# Altium PCB ET-master.PcbDoc (part 1 of 2)
Units mil, origin at the board's own origin, x right, y up, seen from the top; angles counter-clockwise.
Board outline 6299 x 3937 mil, 4 copper layers (TopLayer, agnd, power, BottomLayer); 134 components, 185 nets, 734 pads, 100 vias.
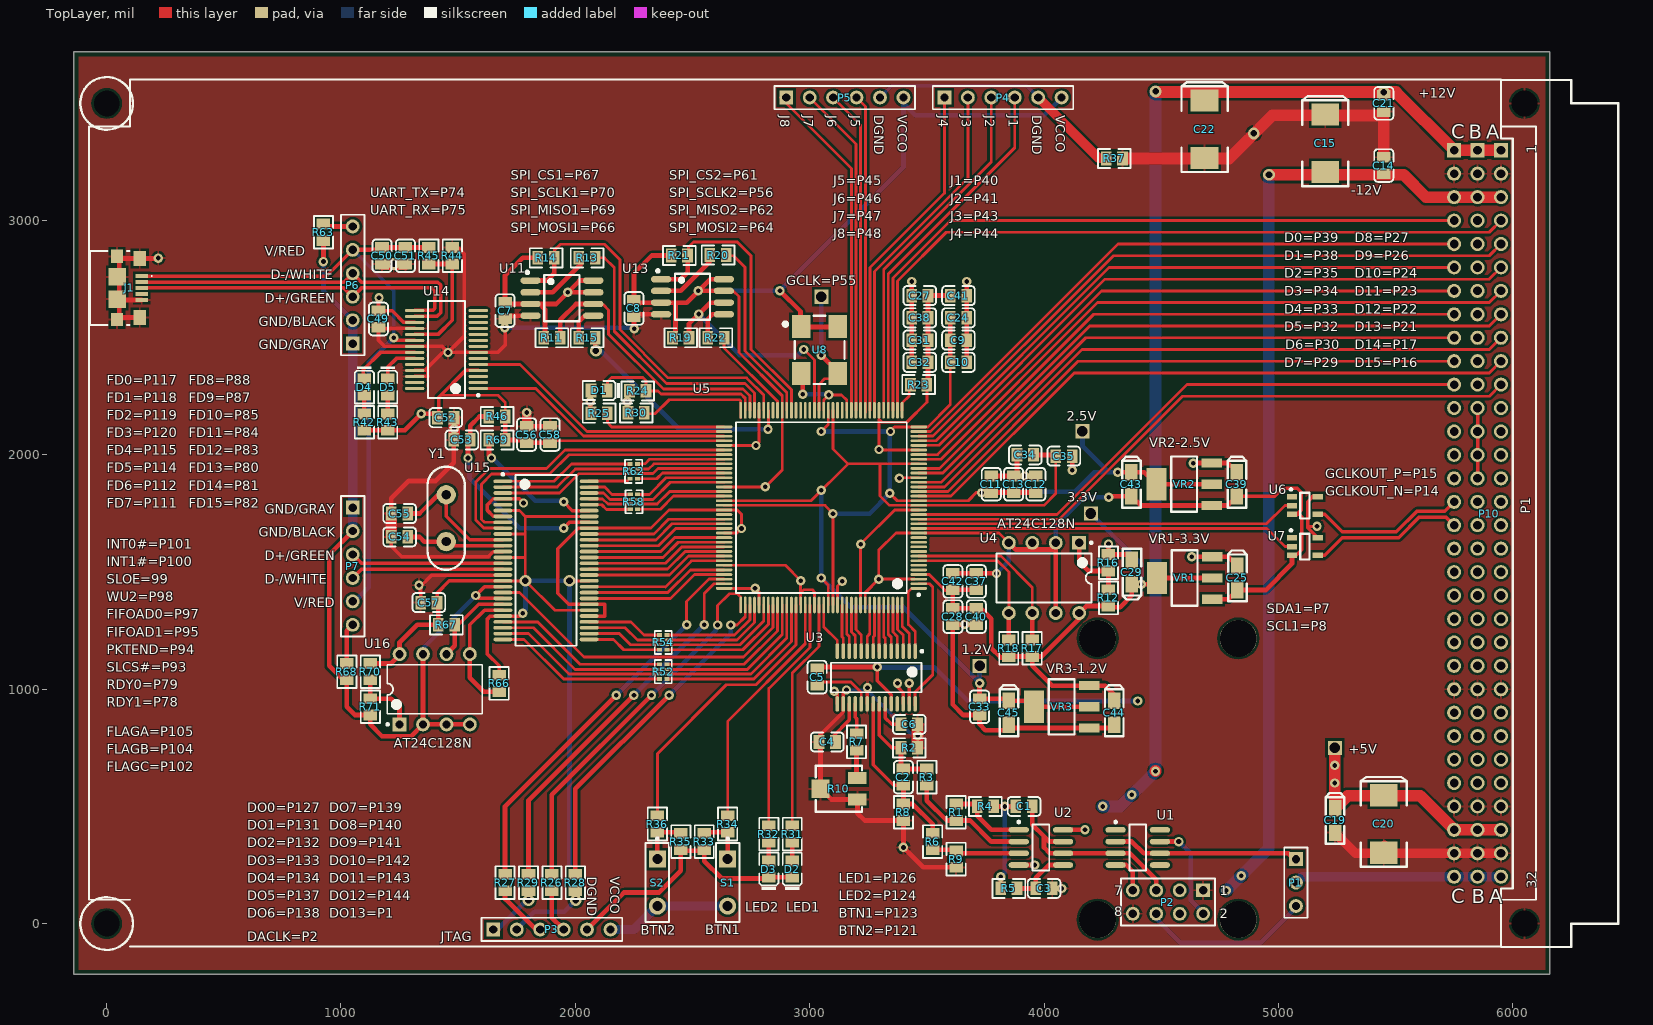
[diagram p0: TopLayer view]
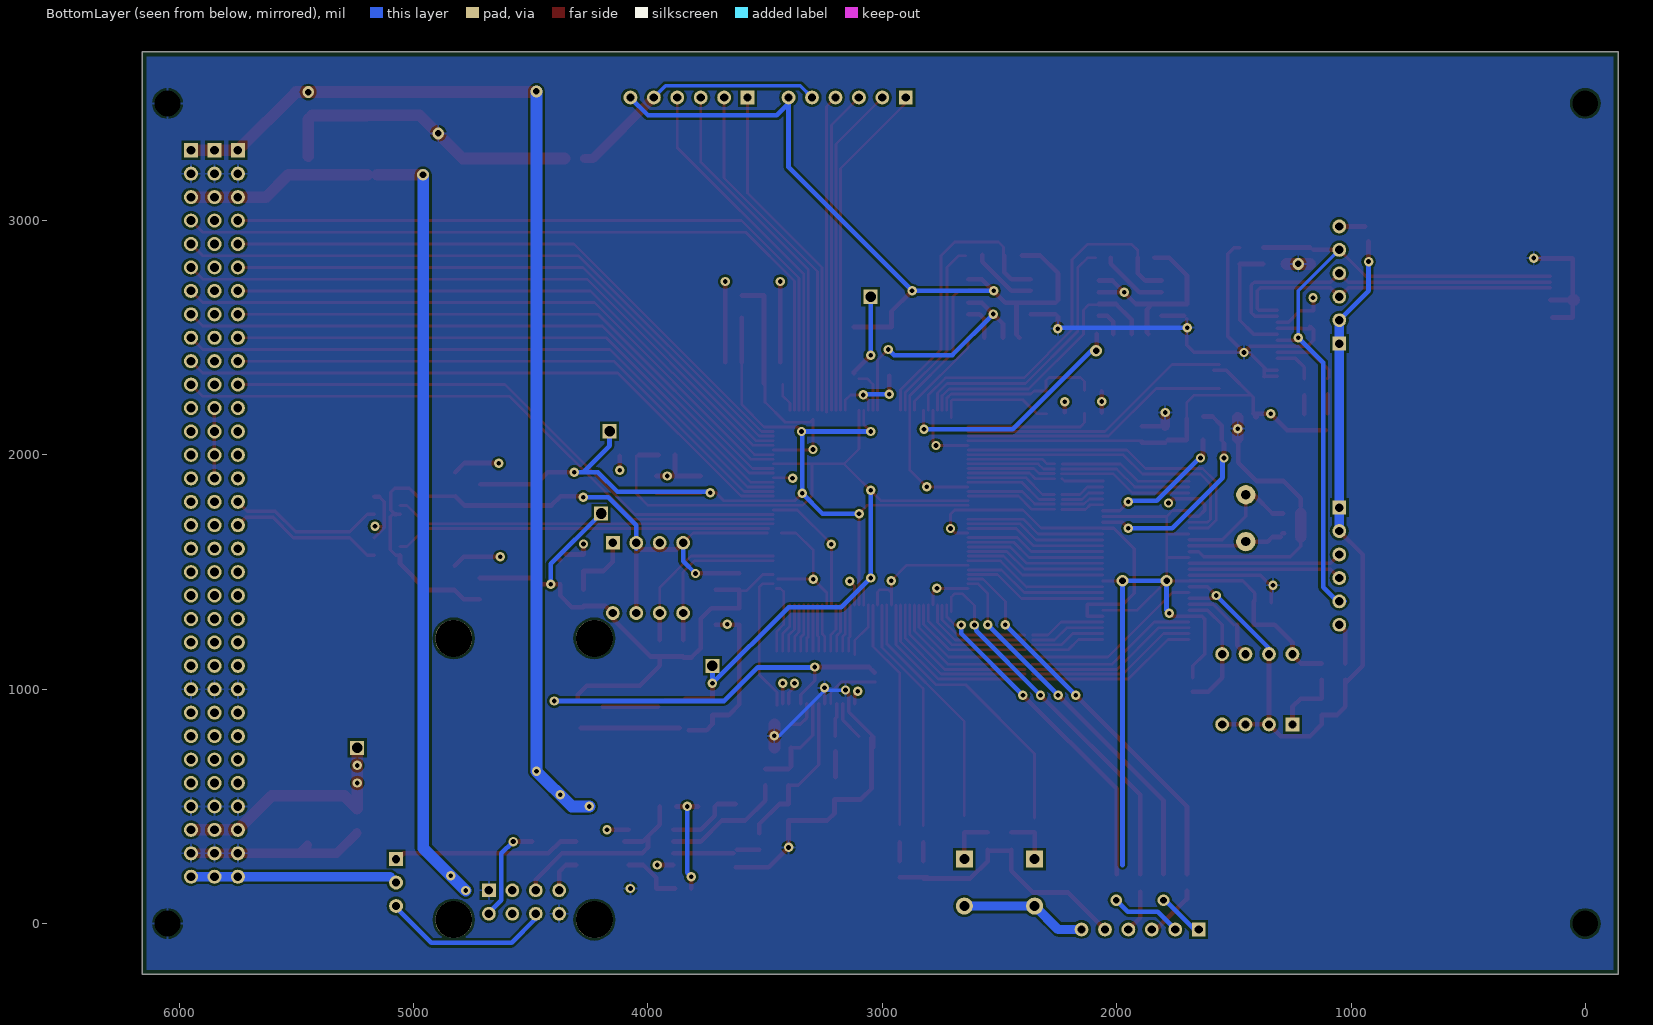
[diagram p1: BottomLayer view, seen from below]
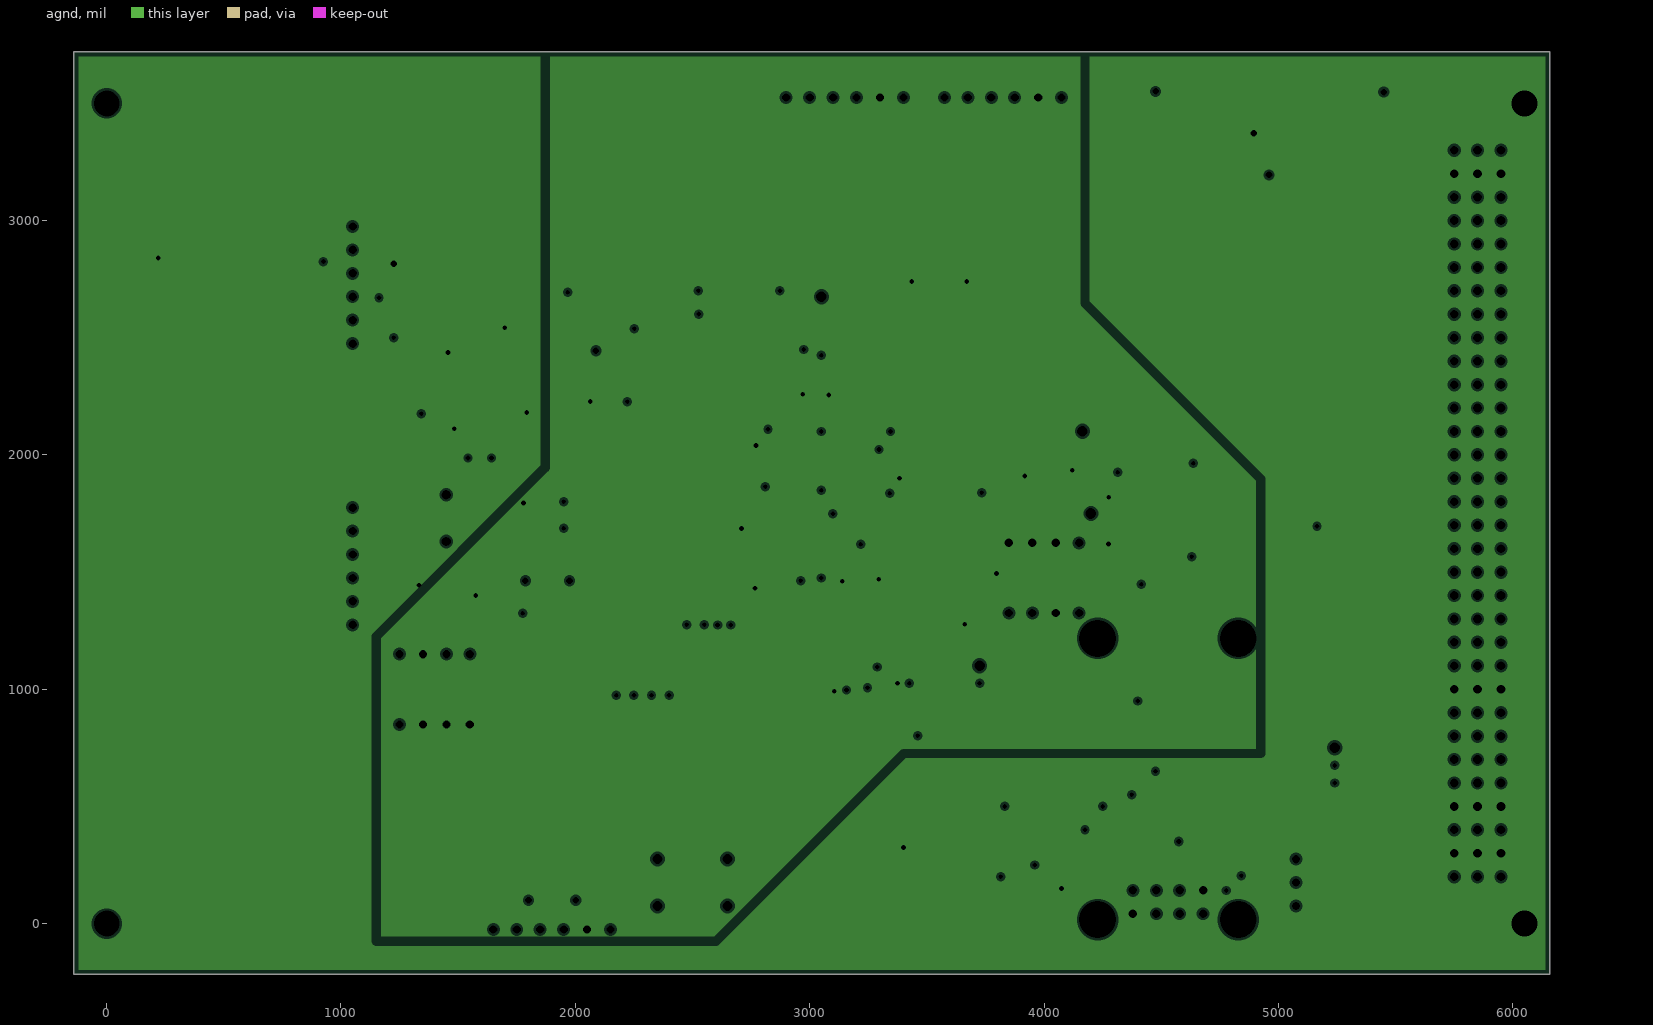
[diagram p2: agnd, clearances drawn from the general rule]
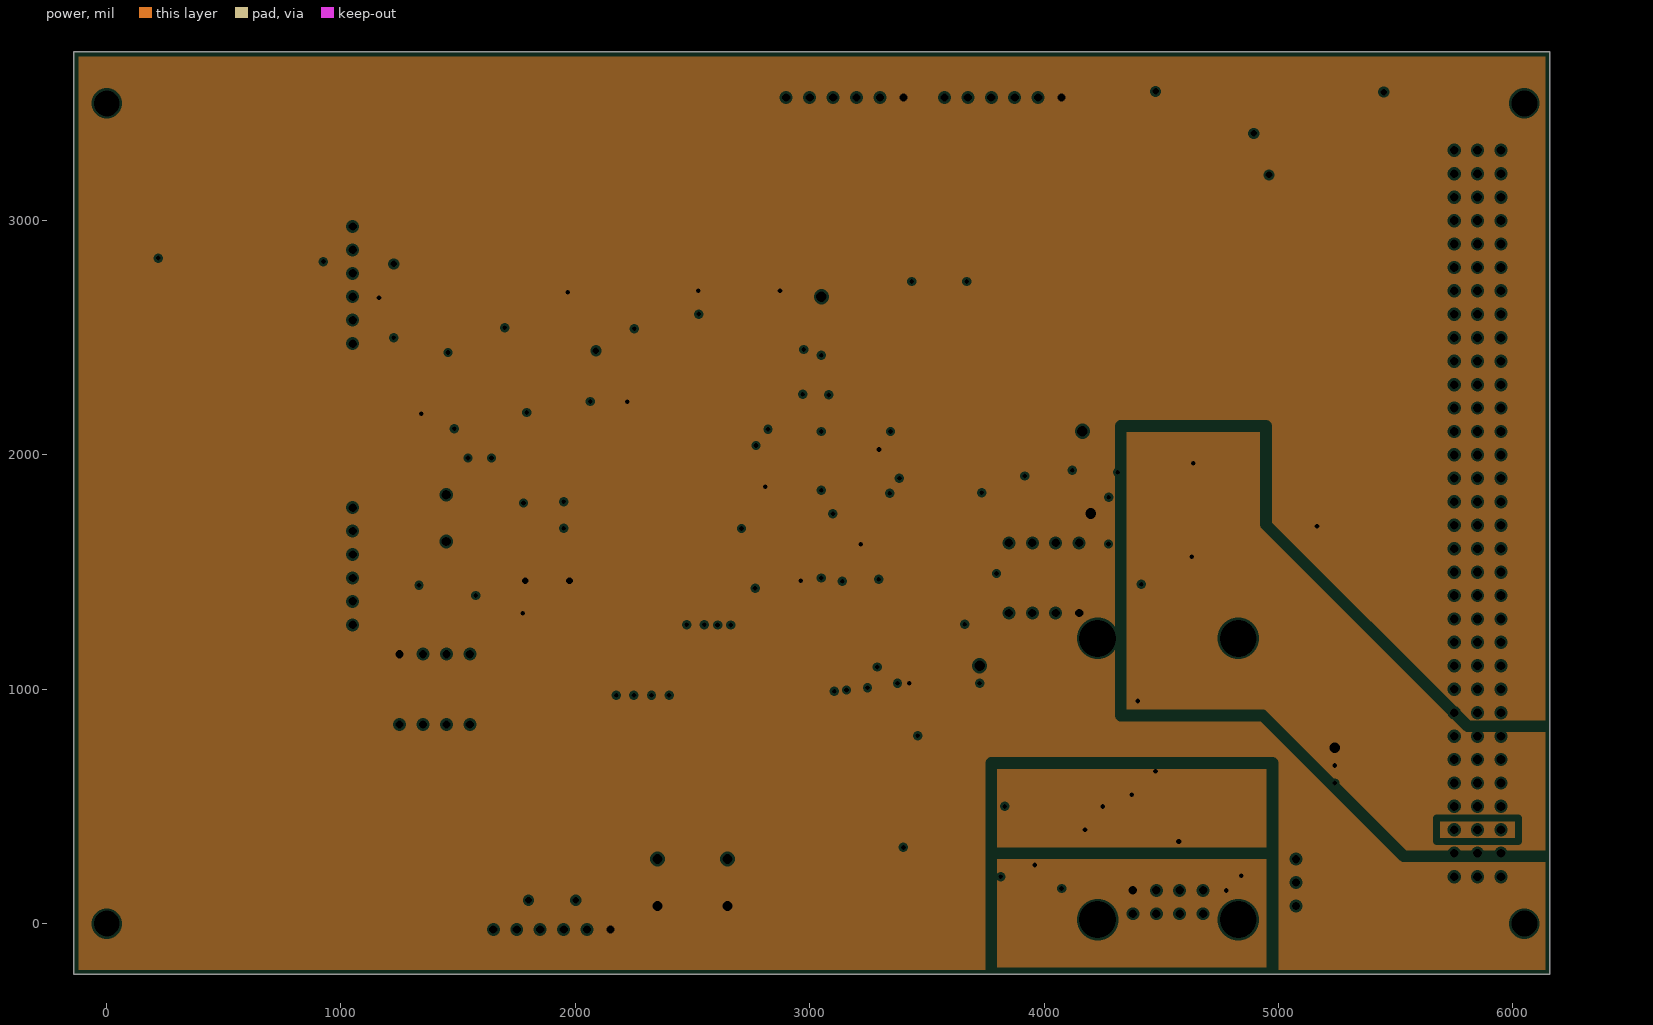
[diagram p3: power, clearances drawn from the general rule]
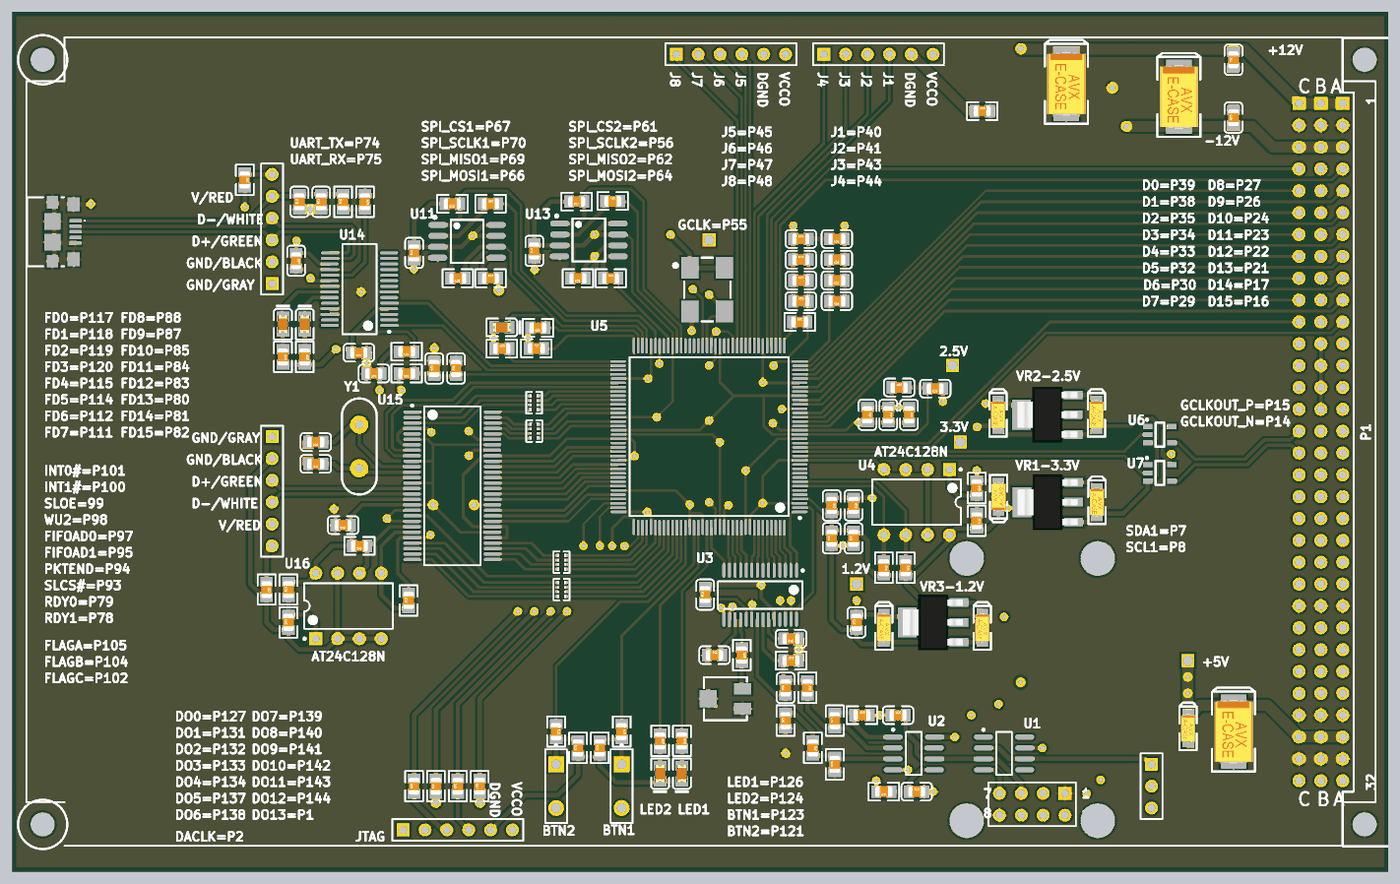
[diagram p5: 3D render of the assembled board from above, using the file's embedded part models]

## Layer stack, top to bottom
TopSolder: solder mask 0.4, Solder Resist, Dk 3.5
TopLayer: signal copper 1.4
Dielectric1: core 12.6, FR-4, Dk 4.8
agnd: plane copper 1.4, net (Multiple Nets)
Dielectric2: prepreg 12.6, FR-4, Dk 4.8
power: plane copper 1.4, net (Multiple Nets)
Dielectric3: core 12.6, FR-4, Dk 4.8
BottomLayer: signal copper 1.4
BottomSolder: solder mask 0.4, Solder Resist, Dk 3.5

## Board outline
-140,-217 6159,-217 6159,3720 -140,3720

## Design rules (kind name [scope] priority, off if disabled: settings)
Clearance [All] p1: gap=6
DiffPairsRouting [All] p1: maxlimit=10 minlimit=10 mostfreqgap=10 toplayer_minwidth=15 toplayer_maxwidth=15 toplayer_prefwidth=15 bottomlayer_minwidth=15 bottomlayer_maxwidth=15 bottomlayer_prefwidth=15 maxuncoupledlength=500
FabricationTestPointUsage TestPointUsage [All] p1: valid=0 allowmultiple=FALSE
FabricationTestpoint Testpoint [All] p1: side=3 testpointundercomponent=TRUE minsize=40 maxsize=100 preferedsize=60 minholesize=20 maxholesize=40 preferedholesize=32 testpointgrid=1 allowsidetop=TRUE allowsidebottom=TRUE usegrid=TRUE gridtolerance=0.01
PlaneClearance [All] p1: clearance=10
PlaneConnect [All] p1: planeconnectstyle=Relief reliefexpansion=20 reliefentries=4 reliefconductorwidth=10 reliefairgap=10
PolygonConnect [All] p1: connectstyle=Relief reliefconductorwidth=10 reliefentries=4 polygonreliefangle="90 Angle" airgapwidth=10
RoutingVias [All] p1: holewidth=20 width=40 viastyle="Through Hole" minholewidth=20 minwidth=40 maxholewidth=20 maxwidth=40
SilkToSolderMaskClearance SilkscreenOverComponentPads [IsPad] p1: minsilkscreentomaskgap=10 clearancetoexposedcopper=TRUE
SolderMaskExpansion [All] p1: expansion=2
Width [All] p1: maxlimit=100 minlimit=10 preferedwidth=20
23 further rules are at their usual default settings.

## Classes and differential pairs
component class ET-UARTPmod: C49 C50 C51 C52 D4 D5 J1 P4 P5 P6 R42 R43 R44 R45 R63 U14
component class ET-FLASHEEPROM: C7 C8 D1 P3 R11 R12 R13 R14 R15 R16 R17 R18 R19 R20 R21 R22 R23 R24 R25 R26 R27 R28 R29 R30 U4 U11 U13
component class ET-DAC: C1 C2 C3 C4 C5 C6 J2 P1 P2 R1 R2 R3 R4 R5 R6 R7 R8 R9 R10 U1 U2 U3
component class ET-power: C9 C10 C11 C12 C13 C14 C15 C19 C20 C21 C22 C24 C25 C27 C28 C29 C31 C32 C33 C34 C35 C37 C38 C39 C40 C41 C42 C43 C44 C45 P10 R37 VR1 VR2 VR3
component class ET-FPGAIO: U5 U6 U7
component class ET-GCLK: D2 D3 R31 R32 R33 R34 R35 R36 S1 S2 U8
component class ET-USB: C53 C54 C55 C56 C57 C58 P7 R46 R52 R54 R58 R62 R66 R67 R68 R69 R70 R71 U15 U16 Y1
differential pair GCLKOUT: +GCLKOUT_P -GCLKOUT_N
differential pair GCLK: +GCLK_P -GCLK_N
differential pair USBD: +USBD_P -USBD_N
differential pair D: +D_P -D_N

## Components (designator, comment, footprint, x,y, rotation, side; value= is the part's Value field where it differs from the comment)
C1 "47pF (470) 5% 50V" LC-0805_C 3914.96,500 r0 top
C2 "22pF (220) 5% 50V" LC-0805_C 3400,625 r90 top
C3 "47pF (470) 5% 50V" LC-0805_C 4000,150 r0 top
C4 "100nF(104) 10% 50V" LC-0805_C 3075,775 r0 top
C5 "100nF(104) 10% 50V" LC-0805_C 3032,1052 r90 top
C6 "100nF(104) 10% 50V" LC-0805_C 3425,850 r180 top
C7 "100nF(104) 10% 50V" LC-0805_C 1700,2616 r90 top
C8 "100nF(104) 10% 50V" LC-0805_C 2250,2625 r90 top
C9 "4.7uF" LC-0805_C 3635,2490 r180 top
C10 "4.7uF" LC-0805_C 3635,2395 r180 top
C11 "4.7uF" LC-0805_C 3775,1875 r270 top
C12 "4.7uF" LC-0805_C 3965,1875 r270 top
C13 "4.7uF" LC-0805_C 3870,1875 r270 top
C14 "100nF(104) 10% 50V" LC-0805_C 5450,3235 r90 top
C15 "22uF" CASE-E_7343 5200,3330 r90 top
C19 "10uF (106) ±10% 16V" LC-CASE-A_3216 5242,440 r90 top
C20 "22uF" CASE-E_7343 5450,425 r90 top
C21 "100nF(104) 10% 50V" LC-0805_C 5450,3500 r90 top
C22 "22uF" CASE-E_7343 4685,3390 r90 top
C24 "470nF" LC-0805_C 3635,2585 r180 top
C25 "10uF (106) ±10% 16V" LC-CASE-A_3216 4825,1475 r90 top
C27 "470nF" LC-0805_C 3470,2680 r0 top
C28 "4.7uF" LC-0805_C 3611,1310 r90 top
C29 "10uF (106) ±10% 16V" LC-CASE-A_3216 4375,1500 r270 top
C31 "470nF" LC-0805_C 3470,2490 r0 top
C32 "4.7uF" LC-0805_C 3470,2395 r0 top
C33 "4.7uF" LC-0805_C 3725,925 r90 top
C34 "4.7uF" LC-0805_C 3920,2000 r0 top
C35 "4.7uF" LC-0805_C 4085,1995 r180 top
C37 "470nF" LC-0805_C 3711,1460 r270 top
C38 "4.7uF" LC-0805_C 3470,2585 r0 top
C39 "10uF (106) ±10% 16V" LC-CASE-A_3216 4822.83,1875 r90 top
C40 "470nF" LC-0805_C 3711,1310 r90 top
C41 "4.7uF" LC-0805_C 3635,2680 r180 top
C42 "4.7uF" LC-0805_C 3611,1460 r270 top
C43 "10uF (106) ±10% 16V" LC-CASE-A_3216 4372.83,1875 r90 top
C44 "10uF (106) ±10% 16V" LC-CASE-A_3216 4300,900 r90 top
C45 "10uF (106) ±10% 16V" LC-CASE-A_3216 3850,900 r90 top
C49 "100nF(104) 10% 50V" LC-0805_C 1160,2580 r270 top
C50 "1uF (105) 10% 50V" LC-0805_C 1175,2850 r90 top
C51 "100nF(104) 10% 50V" LC-0805_C 1275,2850 r90 top
C52 "100nF(104) 10% 50V" LC-0805_C 1447,2159 r180 top
C53 "1uF (105) 10% 50V" LC-0805_C 1516,2064 r180 top
C54 "12pF (120) 5% 50V" LC-0805_C 1250,1650 r180 top
C55 "12pF (120) 5% 50V" LC-0805_C 1250,1750 r180 top
C56 "4.7uF (475) 10% 25V" LC-0805_C 1792,2087 r90 top
C57 "4.7uF (475) 10% 25V" LC-0805_C 1375,1370 r180 top
C58 "47nF (473) 10% 50V" LC-0805_C 1892,2087 r90 top
D1 "红灯 0805" LC-0805_LED_S1 2101.57,2275 r180 top
D2 "红灯 0805" LC-0805_LED_S1 2925.75,232.31 r90 top
D3 "红灯 0805" LC-0805_LED_S1 2825.75,232.31 r90 top
D4 "红灯 0805" LC-0805_LED_S1 1099.61,2289.76 r270 top
D5 "红灯 0805" LC-0805_LED_S1 1199.61,2289.76 r270 top
J1 "1981568-1" TECO-1981568-5_V 150,2712.5 r270 top
P1 "Header 3" HDR1X3 5075,275 r270 top
P2 "Header 4X2" HDR2X4 4679,142 r180 top
P3 "Header 6" HDR1X6 1650,-25 r0 top
P4 "Header 6" HDR1X6 3575,3525 r0 top
P5 "Header 6" HDR1X6 2900,3525 r0 top
P6 "Header 6" HDR1X6 1050,2475 r90 top
P7 "Header 6" HDR1X6 1050,1775 r270 top
P10 "CNVME96" CNVME96 5950,3300 r90 top locked
R1 "1.8KΩ (1801) ±1%" LC-0805_R 3625,475 r90 top
R2 "49.9Ω (49R9) ±1%" LC-0805_R 3425,750 r0 top
R3 "100Ω (1000) ±1%" LC-0805_R 3500,625 r270 top
R4 "1KΩ (1001) ±1%" LC-0805_R 3750,500 r0 top
R5 "1KΩ (1001) ±1%" LC-0805_R 3850,150 r180 top
R6 "100Ω (1000) ±1%" LC-0805_R 3525,350 r270 top
R7 "2KΩ (2001) ±1%" LC-0805_R 3200,775 r270 top
R8 "49.9Ω (49R9) ±1%" LC-0805_R 3400,475 r90 top
R9 "1.8KΩ (1801) ±1%" LC-0805_R 3625,275 r90 top
R10 "20K" POT4MM-2 3125,575 r180 top
R11 "100Ω (1000) ±1%" LC-0805_R 1900,2500 r180 top
R12 "10KΩ (1002) ±1%" LC-0805_R 4275,1389.96 r270 top
R13 "100Ω (1000) ±1%" LC-0805_R 2050,2841 r0 top
R14 "4.7KΩ (4701) ±1%" LC-0805_R 1875,2841 r180 top
R15 "100Ω (1000) ±1%" LC-0805_R 2050,2500 r0 top
R16 "10KΩ (1002) ±1%" LC-0805_R 4275,1539.96 r270 top
R17 "2KΩ (2001) ±1%" LC-0805_R 3949.6,1175.13 r270 top
R18 "2KΩ (2001) ±1%" LC-0805_R 3849.6,1175.13 r270 top
R19 "100Ω (1000) ±1%" LC-0805_R 2450,2500 r180 top
R20 "100Ω (1000) ±1%" LC-0805_R 2609,2853 r0 top
R21 "4.7KΩ (4701) ±1%" LC-0805_R 2444,2851 r180 top
R22 "100Ω (1000) ±1%" LC-0805_R 2600,2500 r0 top
R23 "4.7KΩ (4701) ±1%" LC-0805_R 3465,2300 r0 top
R24 "270Ω (2700) ±1%" LC-0805_R 2266.57,2273 r180 top
R25 "4.7KΩ (4701) ±1%" LC-0805_R 2101.57,2178 r0 top
R26 "200Ω (2000) ±1%" LC-0805_R 1900,175 r90 top
R27 "200Ω (2000) ±1%" LC-0805_R 1700,175 r90 top
R28 "200Ω (2000) ±1%" LC-0805_R 2000,175 r90 top
R29 "200Ω (2000) ±1%" LC-0805_R 1800,175 r90 top
R30 "1KΩ (1001) ±1%" LC-0805_R 2259.57,2179 r0 top
R31 "1KΩ (1001) ±1%" LC-0805_R 2925.75,382.31 r270 top
R32 "1KΩ (1001) ±1%" LC-0805_R 2825.75,382.31 r270 top
R33 "10KΩ (1002) ±1%" LC-0805_R 2550,350 r90 top
R34 "10KΩ (1002) ±1%" LC-0805_R 2650,425 r270 top
R35 "10KΩ (1002) ±1%" LC-0805_R 2450,350 r90 top
R36 "10KΩ (1002) ±1%" LC-0805_R 2350,425 r270 top
R37 "0Ω (0R0) ±1%" LC-0805_R 4300,3265 r0 top
R42 "1KΩ (1001) ±1%" LC-0805_R 1099.61,2139.76 r270 top
R43 "1KΩ (1001) ±1%" LC-0805_R 1199.61,2139.76 r270 top
R44 "10KΩ (1002) ±1%" LC-0805_R 1475,2850 r270 top
R45 "4.7KΩ (4701) ±1%" LC-0805_R 1375,2850 r90 top
R46 "100KΩ (1003) ±1%" LC-0805_R 1666,2164 r180 top
R52 "33Ω (330) ±5%" LC-0402_Rx4 2375,1075 r90 top
R54 "33Ω (330) ±5%" LC-0402_Rx4 2375,1200 r90 top
R58 "33Ω (330) ±5%" LC-0402_Rx4 2250,1800 r90 top
R62 "33Ω (330) ±5%" LC-0402_Rx4 2249,1930 r90 top
R63 "1MΩ (1004) ±1%" LC-0805_R 925,2950 r270 top
R66 "2KΩ (2001) ±1%" LC-0805_R 1675,1025 r90 top
R67 "2KΩ (2001) ±1%" LC-0805_R 1450,1275 r180 top
R68 "1MΩ (1004) ±1%" LC-0805_R 1025,1075 r270 top
R69 "10KΩ (1002) ±1%" LC-0805_R 1666,2064 r180 top
R70 "10KΩ (1002) ±1%" LC-0805_R 1125,1075 r90 top
R71 "10KΩ (1002) ±1%" LC-0805_R 1125,925 r90 top
S1 "SW-PB" SPST-2 2650,175 r270 top
S2 "SW-PB" SPST-2 2350,175 r270 top
U1 "AD817AR" ADI-R-8_N 4400,325 r0 top
U2 "AD8066AR" ADI-R-8_N 3986.93,325 r0 top
U3 "AD9764ARZ" RU-28_N 3284,1050 r270 top
U4 "AT24C128N" 8P3 4000,1475 r270 top
U5 "XC6SLX9-2TQG144C" TQG144_N 3050,1775 r180 top locked
U6 "SN74LVC1G14" SOT-23-5 5114,1783 r0 top
U7 "SN74LVC1G14" SOT-23-5 5114,1608 r0 top
U8 "SG-310SCF 40MHZ 3.3V" LC-SMD-7050_4P 3042,2448 r270 top
U11 "W25Q64" LC-SOIC-8_208mil 1942.7,2669 r270 top
U13 "W25Q64" LC-SOIC-8_208mil 2500,2675 r270 top
U14 "FT232RL-Reel" SSOP-28_N 1450,2450 r180 top
U15 "CY7C68013A-56PVXC" O56_N 1875,1550 r0 top
U16 "AT24C128N" 8P3 1400,1000 r90 top
VR1 "AMS1117-3.3" LC-SOT-223 4600,1475 r0 top
VR2 "AMS1117-2.5" LC-SOT-223 4597.83,1875 r0 top
VR3 "AMS1117-1.2" LC-SOT-223 4075,925 r0 top
Y1 "24MHZ" XTAL5 1449,1630 r90 top

## Footprints (in the part's own frame and the unit in brackets; to place one, negate y for a bottom-side part, rotate by r counter-clockwise, add the part's x,y. Pads: shape width x height; smd on the part's side, far side on the other; paste and mask are expansions set on the pad)
8P3 [mm] "DIP, 8-Leads, Row Spacing 7.62mm, Pitch 2.54mm, Body 9.59x6.61mm"
  rect 1.5x1.5 hole 0.9: 1(-3.81,3.81)
  round 1.5 hole 0.9: 2(-3.81,1.27) 3(-3.81,-1.27) 4(-3.81,-3.81) 5(3.81,-3.81) 6(3.81,-1.27) 7(3.81,1.27) 8(3.81,3.81)
  silkscreen extent -3.93,-5.15 2.65,5.24, body extent -3.6,-5.15 3.6,5.15, height 5.34
ADI-R-8_N [mm] "SOIC, 8-Leads, Body 4.9x3.9mm, Pitch 1.27mm, IPC Medium Density"
  oval 2.2x0.6 smd: 1(-2.4,1.905) 2(-2.4,0.635) 3(-2.4,-0.635) 4(-2.4,-1.905) 5(2.4,-1.905) 6(2.4,-0.635) 7(2.4,0.635) 8(2.4,1.905)
  silkscreen extent -2.52,-2.5 0.9,2.88, body extent -2,-2.5 2,2.5, height 1.75
CASE-E_7343 [mm]
  rect 2.4x3 smd: 1(3.12,0) 2(-3.12,0)
  silkscreen extent -4.65,-2.5 5.1,2.5, body extent -3.7,-2.23 3.7,2.22, height 4.2
CNVME96 [mil]
  round 50 hole 110: 97(200,-100) 98(-3300,-100)
  rect 60x60 / inner round 60 / far side rect 60x60 hole 37: A1(0,0) B1(0,100) C1(0,200)
  round 60 hole 37: A2(-100,0) A3(-200,0) A4(-300,0) A5(-400,0) A6(-500,0) A7(-600,0) A8(-700,0) A9(-800,0) A10(-900,0) A11(-1000,0) A12(-1100,0) A13(-1200,0) A14(-1300,0) A15(-1400,0) A16(-1500,0) A17(-1600,0) A18(-1700,0) A19(-1800,0) A20(-1900,0) A21(-2000,0) A22(-2100,0) A23(-2200,0) A24(-2300,0) A25(-2400,0) A26(-2500,0) A27(-2600,0) A28(-2700,0) A29(-2800,0) A30(-2900,0) A31(-3000,0) A32(-3100,0) B2(-100,100) B3(-200,100) B4(-300,100) B5(-400,100) B6(-500,100) B7(-600,100) B8(-700,100) B9(-800,100) B10(-900,100) B11(-1000,100) B12(-1100,100) B13(-1200,100) B14(-1300,100) B15(-1400,100) B16(-1500,100) B17(-1600,100) B18(-1700,100) B19(-1800,100) B20(-1900,100) B21(-2000,100) B22(-2100,100) B23(-2200,100) B24(-2300,100) B25(-2400,100) B26(-2500,100) B27(-2600,100) B28(-2700,100) B29(-2800,100) B30(-2900,100) B31(-3000,100) B32(-3100,100) C2(-100,200) C3(-200,200) C4(-300,200) C5(-400,200) C6(-500,200) C7(-600,200) C8(-700,200) C9(-800,200) C10(-900,200) C11(-1000,200) C12(-1100,200) C13(-1200,200) C14(-1300,200) C15(-1400,200) C16(-1500,200) C17(-1600,200) C18(-1700,200) C19(-1800,200) C20(-1900,200) C21(-2000,200) C22(-2100,200) C23(-2200,200) C24(-2300,200) C25(-2400,200) C26(-2500,200) C27(-2600,200) C28(-2700,200) C29(-2800,200) C30(-2900,200) C31(-3000,200) C32(-3100,200)
  silkscreen extent -3400,-500 300,0
HDR1X3 [mm] "Connector; Header; 3 Position"
  rect 1.5x1.5 hole 0.9: 1(0,0)
  round 1.5 hole 0.9: 2(2.54,0) 3(5.08,0)
  silkscreen extent -1.27,-1.27 6.35,1.27
HDR1X6 [mm] "Connector; Header; 6 Position"
  rect 1.5x1.5 hole 0.9: 1(0,0)
  round 1.5 hole 0.9: 2(2.54,0) 3(5.08,0) 4(7.62,0) 5(10.16,0) 6(12.7,0)
  silkscreen extent -1.27,-1.27 13.97,1.27
HDR2X4 [mm] "Connector; Header; 4x2 Position"
  rect 1.5x1.5 hole 0.9: 1(0,0)
  round 1.5 hole 0.9: 2(0,2.54) 3(2.54,0) 4(2.54,2.54) 5(5.08,0) 6(5.08,2.54) 7(7.62,0) 8(7.62,2.54)
  silkscreen extent -1.27,-1.27 8.89,3.81
LC-0402_Rx4 [mm]
  rect 0.4x0.55 smd mask+0.051: 1(-0.8,-0.4) 4(0.8,-0.4) 5(0.8,0.4) 8(-0.8,0.4)
  rect 0.3x0.55 smd mask+0.051: 2(-0.25,-0.4) 3(0.25,-0.4) 6(0.25,0.4) 7(-0.25,0.4)
  silkscreen extent -1.25,-0.93 1.25,0.92, body extent -1,-0.5 1,0.5, height 0.45
LC-0805_C [mm]
  rect 1.16x1.47 smd: 1(-0.89,0) 2(0.89,0)
  silkscreen extent -1.77,-1.04 1.77,1.04, body extent -1,-0.62 1,0.63, height 0.77
LC-0805_LED_S1 [mm]
  rect 1.16x1.47 smd: A(0.89,0) K(-0.89,0)
  silkscreen extent -2.25,-1.04 1.77,1.03, body extent -1.01,-0.62 1.01,0.62, height 1.1
LC-0805_R [mm]
  rect 1.16x1.47 smd: 1(-0.89,0) 2(0.89,0)
  silkscreen extent -1.77,-1.04 1.77,1.03, body extent -1,-0.65 1,0.65, height 0.77
LC-CASE-A_3216 [mm]
  rect 1.8x1.35 smd: 1(1.31,0) 2(-1.31,0)
  silkscreen extent -2.54,-1 2.97,1, body extent -1.7,-0.84 1.7,0.84, height 1.71
LC-SMD-7050_4P [mm]
  rect 2.5x2 smd: 1(-2.54,-2) 2(2.54,-2) 3(2.54,2) 4(-2.54,2)
  silkscreen extent -3.7,-3.9 3.7,2.7
LC-SOIC-8_208mil [mm]
  oval 0.7x2.2 smd: 1(-1.905,-3.4) 2(-0.635,-3.4) 3(0.635,-3.4) 4(1.905,-3.4) 5(1.905,3.4) 6(0.635,3.4) 7(-0.635,3.4) 8(-1.905,3.4)
  silkscreen extent -2.95,-3.9 2.5,1.9
LC-SOT-223 [mm]
  rect 2.2x1 smd: 1(3,-2.3) 2(3,0) 3(3,2.3)
  rect 2.2x3.5 smd: 2(-3,0)
  silkscreen extent -1.4,-3 1.4,3, body extent -3.49,-3.24 3.49,3.24, height 1.64
O56_N [mm] "SOP, 56-Leads, Body 18.4x7.5mm, Pitch 0.635mm, IPC Medium Density"
  oval 2.05x0.4 smd: 1(-4.675,8.572) 2(-4.675,7.938) 3(-4.675,7.302) 4(-4.675,6.667) 5(-4.675,6.032) 6(-4.675,5.397) 7(-4.675,4.763) 8(-4.675,4.127) 9(-4.675,3.492) 10(-4.675,2.857) 11(-4.675,2.222) 12(-4.675,1.587) 13(-4.675,0.953) 14(-4.675,0.318) 15(-4.675,-0.318) 16(-4.675,-0.953) 17(-4.675,-1.587) 18(-4.675,-2.222) 19(-4.675,-2.857) 20(-4.675,-3.492) 21(-4.675,-4.127) 22(-4.675,-4.763) 23(-4.675,-5.397) 24(-4.675,-6.032) 25(-4.675,-6.667) 26(-4.675,-7.302) 27(-4.675,-7.938) 28(-4.675,-8.572) 29(4.675,-8.572) 30(4.675,-7.938) 31(4.675,-7.302) 32(4.675,-6.667) 33(4.675,-6.032) 34(4.675,-5.397) 35(4.675,-4.763) 36(4.675,-4.127) 37(4.675,-3.492) 38(4.675,-2.857) 39(4.675,-2.222) 40(4.675,-1.587) 41(4.675,-0.953) 42(4.675,-0.318) 43(4.675,0.318) 44(4.675,0.953) 45(4.675,1.587) 46(4.675,2.222) 47(4.675,2.857) 48(4.675,3.492) 49(4.675,4.127) 50(4.675,4.763) 51(4.675,5.397) 52(4.675,6.032) 53(4.675,6.667) 54(4.675,7.302) 55(4.675,7.938) 56(4.675,8.572)
  silkscreen extent -4.8,-9.25 3.3,9.45, body extent -3.79,-9.27 3.79,9.27, height 2.8
POT4MM-2 [mm] "Square Trimming Potentiometer"
  rect 2x1.3 smd: CCW(-2,-1.15) CW(-2,1.15)
  rect 2x2 smd: W(2,0)
  silkscreen extent -2.5,-2.5 2.5,2.5
RU-28_N [mm] "TSOP, 28-Leads, Body 9.7x4.4mm, Pitch 0.65mm, IPC Medium Density"
  oval 1.7x0.35 smd: 1(-2.85,4.225) 2(-2.85,3.575) 3(-2.85,2.925) 4(-2.85,2.275) 5(-2.85,1.625) 6(-2.85,0.975) 7(-2.85,0.325) 8(-2.85,-0.325) 9(-2.85,-0.975) 10(-2.85,-1.625) 11(-2.85,-2.275) 12(-2.85,-2.925) 13(-2.85,-3.575) 14(-2.85,-4.225) 15(2.85,-4.225) 16(2.85,-3.575) 17(2.85,-2.925) 18(2.85,-2.275) 19(2.85,-1.625) 20(2.85,-0.975) 21(2.85,-0.325) 22(2.85,0.325) 23(2.85,0.975) 24(2.85,1.625) 25(2.85,2.275) 26(2.85,2.925) 27(2.85,3.575) 28(2.85,4.225)
  silkscreen extent -2.97,-4.9 1.6,5.08, body extent -2.25,-4.9 2.25,4.9, height 1.2
SOT-23-5 [mm]
  rect 1.1x0.6 smd: 1(-1.425,0.975) 2(-1.425,0.025) 3(-1.425,-0.925) 4(1.375,-0.925) 5(1.375,0.975)
  silkscreen extent -1.65,-1.38 0.47,1.9
SPST-2 [mm] "Switch; 2 Leads"
  rect 1.85x1.85 hole 1.1: 1(-2.54,0)
  round 1.85 hole 1.1: 2(2.54,0)
  silkscreen extent -4.89,-1.27 4.28,1.27
SSOP-28_N [mm] "SOP, 28-Leads, Body 10.2x5.3mm, Pitch 0.65mm, IPC Medium Density"
  oval 2.1x0.35 smd: 1(-3.45,4.225) 2(-3.45,3.575) 3(-3.45,2.925) 4(-3.45,2.275) 5(-3.45,1.625) 6(-3.45,0.975) 7(-3.45,0.325) 8(-3.45,-0.325) 9(-3.45,-0.975) 10(-3.45,-1.625) 11(-3.45,-2.275) 12(-3.45,-2.925) 13(-3.45,-3.575) 14(-3.45,-4.225) 15(3.45,-4.225) 16(3.45,-3.575) 17(3.45,-2.925) 18(3.45,-2.275) 19(3.45,-1.625) 20(3.45,-0.975) 21(3.45,-0.325) 22(3.45,0.325) 23(3.45,0.975) 24(3.45,1.625) 25(3.45,2.275) 26(3.45,2.925) 27(3.45,3.575) 28(3.45,4.225)
  silkscreen extent -3.57,-5.25 2,5.25, body extent -2.8,-5.25 2.8,5.25, height 2
TECO-1981568-5_V [mm] "SMD, 5-Leads, Body 8x5.9mm, Pitch 0.65mm"
  rect 0.4x1.35 smd: 1(-1.3,0) 2(-0.65,0) 3(0,0) 4(0.65,0) 5(1.3,0)
  rect 1.6x1.4 smd: 6(-3.2,-0.225) 7(3.2,-0.225)
  rect 1.45x1.3 smd: 8(-3.425,-2.675) 9(3.425,-2.675)
  rect 1.9x1.9 smd: 10(-1.2,-2.675) 11(1.2,-2.675)
  silkscreen extent -4,-5.63 4,1.12, body extent -4,-5.63 4,0.28, height 3
TQG144_N [mm] "Thin QFP, 144-Leads, Body 20x20mm, Pitch 0.5mm, IPC Medium Density"
  oval 1.8x0.3 smd: 1(-10.55,8.75) 2(-10.55,8.25) 3(-10.55,7.75) 4(-10.55,7.25) 5(-10.55,6.75) 6(-10.55,6.25) 7(-10.55,5.75) 8(-10.55,5.25) 9(-10.55,4.75) 10(-10.55,4.25) 11(-10.55,3.75) 12(-10.55,3.25) 13(-10.55,2.75) 14(-10.55,2.25) 15(-10.55,1.75) 16(-10.55,1.25) 17(-10.55,0.75) 18(-10.55,0.25) 19(-10.55,-0.25) 20(-10.55,-0.75) 21(-10.55,-1.25) 22(-10.55,-1.75) 23(-10.55,-2.25) 24(-10.55,-2.75) 25(-10.55,-3.25) 26(-10.55,-3.75) 27(-10.55,-4.25) 28(-10.55,-4.75) 29(-10.55,-5.25) 30(-10.55,-5.75) 31(-10.55,-6.25) 32(-10.55,-6.75) 33(-10.55,-7.25) 34(-10.55,-7.75) 35(-10.55,-8.25) 36(-10.55,-8.75) 73(10.55,-8.75) 74(10.55,-8.25) 75(10.55,-7.75) 76(10.55,-7.25) 77(10.55,-6.75) 78(10.55,-6.25) 79(10.55,-5.75) 80(10.55,-5.25) 81(10.55,-4.75) 82(10.55,-4.25) 83(10.55,-3.75) 84(10.55,-3.25) 85(10.55,-2.75) 86(10.55,-2.25) 87(10.55,-1.75) 88(10.55,-1.25) 89(10.55,-0.75) 90(10.55,-0.25) 91(10.55,0.25) 92(10.55,0.75) 93(10.55,1.25) 94(10.55,1.75) 95(10.55,2.25) 96(10.55,2.75) 97(10.55,3.25) 98(10.55,3.75) 99(10.55,4.25) 100(10.55,4.75) 101(10.55,5.25) 102(10.55,5.75) 103(10.55,6.25) 104(10.55,6.75) 105(10.55,7.25) 106(10.55,7.75) 107(10.55,8.25) 108(10.55,8.75)
  oval 0.3x1.8 smd: 37(-8.75,-10.55) 38(-8.25,-10.55) 39(-7.75,-10.55) 40(-7.25,-10.55) 41(-6.75,-10.55) 42(-6.25,-10.55) 43(-5.75,-10.55) 44(-5.25,-10.55) 45(-4.75,-10.55) 46(-4.25,-10.55) 47(-3.75,-10.55) 48(-3.25,-10.55) 49(-2.75,-10.55) 50(-2.25,-10.55) 51(-1.75,-10.55) 52(-1.25,-10.55) 53(-0.75,-10.55) 54(-0.25,-10.55) 55(0.25,-10.55) 56(0.75,-10.55) 57(1.25,-10.55) 58(1.75,-10.55) 59(2.25,-10.55) 60(2.75,-10.55) 61(3.25,-10.55) 62(3.75,-10.55) 63(4.25,-10.55) 64(4.75,-10.55) 65(5.25,-10.55) 66(5.75,-10.55) 67(6.25,-10.55) 68(6.75,-10.55) 69(7.25,-10.55) 70(7.75,-10.55) 71(8.25,-10.55) 72(8.75,-10.55) 109(8.75,10.55) 110(8.25,10.55) 111(7.75,10.55) 112(7.25,10.55) 113(6.75,10.55) 114(6.25,10.55) 115(5.75,10.55) 116(5.25,10.55) 117(4.75,10.55) 118(4.25,10.55) 119(3.75,10.55) 120(3.25,10.55) 121(2.75,10.55) 122(2.25,10.55) 123(1.75,10.55) 124(1.25,10.55) 125(0.75,10.55) 126(0.25,10.55) 127(-0.25,10.55) 128(-0.75,10.55) 129(-1.25,10.55) 130(-1.75,10.55) 131(-2.25,10.55) 132(-2.75,10.55) 133(-3.25,10.55) 134(-3.75,10.55) 135(-4.25,10.55) 136(-4.75,10.55) 137(-5.25,10.55) 138(-5.75,10.55) 139(-6.25,10.55) 140(-6.75,10.55) 141(-7.25,10.55) 142(-7.75,10.55) 143(-8.25,10.55) 144(-8.75,10.55)
  silkscreen extent -10.68,-9.25 9.25,9.57, body extent -10,-10 10,10, height 1.6
XTAL5 [mm]
  round 2.1 hole 1: 1(0,0) 2(5.08,0)
  silkscreen extent -3.05,-2.03 8.13,2.03

## Part data
C1 C3: library part "0805 47pF (470) 5% 50V", "贴片电容"
C2: library part "0805 22pF (220) 5% 50V", "贴片电容"
C4 C5 C6 C7 C8 C14 C21 C49 C51 C52: library part "0805 100nF(104) 10% 50V", "贴片电容"
C9 C10 C11 C12 C13 C28 C32 C33 C34 C35 C38 C41 C42 C56 C57: library part "0805 4.7uF (475) 10% 25V", "贴片电容"
C15 C20 C22: library part 钽电容
C19 C25 C29 C39 C43 C44 C45: library part "3216 10uF (106) 10% 16V", "钽电容"
C24 C27 C31 C37 C40: library part "0805 470nF (474) 10% 50V", "贴片电容"
C50 C53: library part "0805 1uF (105) 10% 50V", "贴片电容"
C54 C55: library part "0805 12pF (120) 5% 50V", "贴片电容"
C58: library part "0805 47nF (473) 10% 50V", "贴片电容"
D1 D2 D3 D4 D5: library part "0805 红灯", "发光二极管"
J1: "Micro USB Receptacle Standard Type B Assy, 5-Pin SMD, RoHS, Tape and Reel"
P1: "Header, 3-Pin"
P2: "Header, 4-Pin, Dual row"
P3 P4 P5 P6 P7: "Header, 6-Pin"
P10: "96-Pin Connector (3x32 2.54mm grid)"
R1 R9: library part "0805 1.8KΩ (1801) 1%", "贴片电阻"
R2 R8: library part "0805 49.9Ω (49R9) 1%", "贴片电阻"
R3 R6 R11 R13 R15 R19 R20 R22: library part "0805 100Ω (1000) 1%", "贴片电阻"
R4 R5 R30 R31 R32 R42 R43: library part "0805 1KΩ (1001) 1%", "贴片电阻"
R7 R17 R18 R66 R67: library part "0805 2KΩ (2001) 1%", "贴片电阻"
R10: library part "RPot SM", "Square Trimming Potentiometer"
R12 R16 R33 R34 R35 R36 R44 R69 R70 R71: library part "0805 10KΩ (1002) 1%", "贴片电阻"
R14 R21 R23 R25 R45: library part "0805 4.7KΩ (4701) 1%", "贴片电阻"
R24: library part "0805 270Ω (2700) 1%", "贴片电阻"
R26 R27 R28 R29: library part "0805 200Ω (2000) 1%", "贴片电阻"
R37: library part "0805 0Ω (0R0) 1%", "贴片电阻"
R46: library part "0805 100KΩ (1003) 1%", "贴片电阻"
R52 R54 R58 R62: library part "0402*4 33Ω (330) 5%", "贴片排阻"
R63 R68: library part "0805 1MΩ (1004) 1%", "贴片电阻"
S1 S2: "Switch"
U1: "Single Channel Low Power Operational Amplifier, 50 MHz BW, 350 V/us SR, Industrial, 8-pin SOIC (R-8), Tube"
U2: "Double Channel Low Power Operational Amplifier, 145 MHz BW, 180 V/us SR, Industrial, 8-pin SOIC (R-8), Tube"
U3: "Imported"
U4 U16: "1Kbit (128 x 8), 2-wire Bus Automotive Serial EEPROM with Write Protect, 2.5V, 8-Pin TSSOP, Bulk"
U5: "Spartan-6 LX 1.2V FPGA, 102 User I/Os, 144-Pin TQFP (0.5mm Pitch), Speed Grade 2, Commercial Grade, Pb-Free"
U8: library part "SW DIP-2", "DIP Switch, 2 Position, SPST"
U14: "USB UART Asynchronous Serial Data Transfer Chip, SSOP-28, Tape and Reel"
U15: "EZ-USB FX2LP USB Microcontroller Ideal for Non-Battery Powered Applications,16K RAM, 24 I/Os, 56-Pin SSOP, Pb-Free, Commercial Grade"
VR1: library part "SOT-223 AMS1117-3.3", "低压差线性稳压(LDO)"
VR2: library part "SOT-223 AMS1117-2.5", "低压差线性稳压(LDO)"
VR3: library part "SOT-223 AMS1117-1.2", "低压差线性稳压(LDO)"
Y1: library part XTAL, "Crystal Oscillator"

## Free pads (board coordinates)
  rect 60x60 hole 45: 0(3050,2675) 0(4164,2101) 1(3725,1100) 1(5241,750) 2(4200,1750)
  round 50 hole 110: 1(0,3500) 2(0,0)
  round 157.48 hole 157.48: 11(4229,17) 12(4829,17) 13(4229,1217) 14(4829,1217)

## Via types
v1: diameter 40, hole 20, TopLayer to BottomLayer, 89 vias
v2: diameter 50, hole 28, TopLayer to BottomLayer, 10 vias
v3: diameter 40, hole 22, TopLayer to BottomLayer, 1 vias

## Nets (pads, with @x,y where several pads share a name; then routed paths per layer and width w, separated by ;. In a path a pad name is that pad's centre, name@x,y a point inside that pad or via, vN(x,y) a via of type N, cw(c..) or ccw(c..) an arc to the next point about the centre after c; other vN are vias at no path point)
+5V: C5.2 C19.1 C20.1 C25.1 C39.1 P10.A30 P10.B30 P10.C30 pad.1@5241,750 U3.24 VR1.3 VR2.3 | length 3069.8
  TopLayer w15: v1(3289,1095) 3289,1036 3347.98,977.02 U3.24@3347.98,937.8
  TopLayer w20: C5.2@3033,1071.04 3056.96,1095 v1@3280,1095 ; v1@4630.55,1565.55 VR1.3@4718.11,1565.55 4786.02,1565.55 C25.1@4825,1526.57 ; v1@4638.55,1965.55 VR2.3@4715.94,1965.55 4783.86,1965.55 C39.1@4822.83,1926.57
  TopLayer w50: pad.1@5241,750 5241,492.58 C19.1@5242,491.58 5295.42,545 5605,545 P10.C30@5750,400 P10.B30@5850,400 P10.A30@5950,400
  BottomLayer w20: v1@3288.04,1093 3532,1093 3675,950 v1(4400,950)
  other v1: 5241,600 5241,675 4630,1565 4637,1964
+12V: C21.2 C22.1 P2.2 P10.A1 P10.B1 P10.C1 U1.7 U2.8 | length 5318.6
  TopLayer w20: U2.8@4081.42,400 v1(4175,400) ; U1.7@4494.49,350 v3(4575,350)
  TopLayer w50: v1(4476,650) v1@4476,651 ; v2@4478.57,3548.43 4700,3548.43 v2(5450,3548.43) 5501.57,3548.43 P10.C1@5750,3300 P10.B1@5850,3300 P10.A1@5950,3300
  BottomLayer w20: v3(4575,350) 4625.62,299.38 4625.62,99.38 4685,40 4685,47.51 4680,42.51 P2.2@4680,33
  BottomLayer w50: v1(4250,500) 4325,500 v1@4476,651 ; v1(4476,650) v2(4476,3551)
  other v1: 4375,550
+VIN: C1.2 P2.5 U1.3 U2.6 U2.7 | length 899.7
  TopLayer w20: C1.2@3950,500 3950,422.36 4000,372.36 ; U2.7@4100,350 4022.36,350 4000,372.36 ; P2.5@4475,133 P2.5@4488,133 ; P2.5@4479,142 4479,188 4367,300 U1.3@4305.51,300 U2.6@4081.42,300 4025,300 4000,325 4000,372.36
-12V: C14.1 C15.2 P2.7 P10.A3 P10.B3 P10.C3 U1.4 U2.4 | length 4350.8
  TopLayer w20: U2.4@3892.44,250 v1(3960,250) ; U1.4@4305.51,250 4350,250 4379,221 P2.7@4379,142
  TopLayer w50: v2@4959,3195 C15.2@5156,3195 ; C15.2@5196.54,3195 5390,3195 5535,3195 5630,3100 P10.C3@5750,3100 P10.B3@5850,3100 P10.A3@5950,3100
  BottomLayer w50: v1(4778,141) 4959,322 v2@4959,3195
  other v1: 4842,204
  other v2: 4960,3195
-VIN: P2.3
\I\N\T\0\: U5.101 U15.40 | length 609.1
  TopLayer w12: U15.40@2059.06,1487.5 2401.5,1487.5 2482.31,1568.31 U5.101@2634.65,1568.31
\I\N\T\1\: U5.100 U15.41 | length 606.9
  TopLayer w12: U15.41@2059.06,1512.5 2393.5,1512.5 2468.99,1587.99 U5.100@2634.65,1587.99
\S\L\C\S\: U5.93 U15.47 | length 601.8
  TopLayer w12: U15.47@2059.06,1662.5 2335.5,1662.5 2398.79,1725.79 U5.93@2634.65,1725.79
A0: P10.C12
A1: P10.A12
A2: P10.C13
A3: P10.A13
A4: P10.C14
A5: P10.A14
A6: P10.C15
A7: P10.A15
A12: P10.C18
A13: P10.A18
A14: P10.C19
A15: P10.A19
AGND: C3.2 C4.1 C6.1 C7.1 C8.1 C14.2 C15.1 C19.2 C20.2 C21.1 C22.2 C49.2 C50.1 C51.1 C52.1 C53.2 C54.2 C55.2 C56.2 C57.2 C58.2 J1.5 J1.6 J1.7 J1.8 J1.9 J1.10 J1.11 P2.1 P2.8 P10.97 P10.98 P10.A2 P10.A24 P10.A29 P10.A31 P10.B2 P10.B24 P10.B29 P10.B31 P10.C2 P10.C24 P10.C29 P10.C31 R2.2 R8.1 R9.1 R10.CW R10.W R37.2 R44.1 U3.16 U3.20 U11.4 U13.4 U14.7 U14.18 U14.21 U14.25 U14.26 U15.13 U15.17 | length 8994.8
  TopLayer w15: C49.2@1164,2539 1211,2539 1210.43,2539.57 U14.18@1314.17,2539.57 ; C49.2@1175,2550 1160,2535 1160,2490 1187.2,2462.8 U14.21@1314.17,2462.8 1431.2,2462.8 v1(1456.8,2437.2) ; C54.2@1214.96,1650 1214.96,1610.04 1259,1566 1628.91,1566 1650.41,1587.5 U15.13@1690.94,1587.5 ; U14.26@1314.17,2334.84 1371.84,2334.84 1371,2334 1371,2374 ; U14.25@1314.17,2360.43 1357.43,2360.43 1371,2374 ; C57.2@1339.96,1370 1339.96,1439.96 1387.5,1487.5 U15.17@1690.94,1487.5 ; R44.1@1475,2885.04 1498.43,2885.04 1524.96,2858.5 1524.96,2505.37 v1(1456.8,2437.2) ; C7.1@1700,2580.96 1700,2468 1669.2,2437.2 U14.7@1585.83,2437.2 v1(1456.8,2437.2) ; C4.1@3035.65,750.4 3035.65,795.43 3143.25,903.03 U3.16@3143.25,937.8 ; U3.16@3144,939.05 3144,984 v1(3157,997) ; U3.20@3245,938.41 v1@3245,1006 ; 1371,2374 1434.2,2437.2 v1(1456.8,2437.2)
  TopLayer w20: J1.7@141.14,2586.52 53.54,2586.52 J1.11@53.54,2661.32 ; J1.5@150,2661.32 J1.11@53.54,2661.32 ; v1(220,2840) 218.48,2838.48 53.54,2838.48 J1.11@53.54,2661.32 ; C55.2@1214.96,1778.36 1214.96,1814.96 1289,1889 1404,1889 1480.96,1965.96 C53.2@1480.96,2064 ; C7.1@1713.04,2594 U11.4@1808.84,2594 ; C56.2@1792,2122.04 C58.2@1892,2122.04 ; v1@2250,2540 C8.1@2250,2589.96 ; C8.1@2260.04,2600 U13.4@2366.14,2600 ; C4.1@3046.26,793.7 R10.W@3046.26,575 3091.54,529.72 R10.CW@3203.74,529.72 3203.74,471.26 3235.04,439.96 R8.1@3400,439.96 v1(3400,325) 3485.04,239.96 R9.1@3625,239.96
  TopLayer w40: C56.2@1793,2123.04 v1(1793,2181) ; C19.2@5242,388.43 5242,387.15 5329.15,300 C20.2@5477.43,300 ; C20.2@5453,333.57 5486.57,300 P10.C31@5750,300 P10.B31@5850,300 P10.A31@5950,300
  TopLayer w50: J1.11@48.62,2661.32 J1.11@53.54,2661.32 ; C50.1@1175,2814.96 C51.1@1275,2814.96 ; C54.2@1214.96,1650 C55.2@1214.96,1750 ; C53.2@1483.04,2070.92 C52.1@1483.04,2158 ; R2.2@3460.04,750 C6.1@3460.04,850 ; R37.2@4355,3265 4790,3265 4975,3450 5198.43,3450 5200,3448.43 5433.46,3448.43 5450,3431.89 C14.2@5450,3274.39
  BottomLayer w15: v1@3157,996 3245,996 3440,801 v1(3461,801)
  BottomLayer w20: v1(1699,2543) v1@2247,2543
  other v1: 4075,150 3247,1006 1333,1444 1483,2112 2251,2539
  other v2: 1225,2814.96 4895,3372
BTN1: R34.1 U5.123 | length 1036.8
  TopLayer w12: R34.1@2650,460.04 2650,863 2981.1,1194.1 U5.123@2981.1,1359.65
BTN2: R36.1 U5.121 | length 1229.1
  TopLayer w12: R36.1@2350,450 2350,550 2350,725 2644,1019 2771,1019 2941.73,1189.73 U5.121@2941.73,1359.65
CS: P10.B12 P10.B13 P10.B14 P10.B15 | length 300
  TopLayer w15: P10.B15@5850,1900 P10.B14@5850,2000 P10.B13@5850,2100 P10.B12@5850,2200
D0: P10.C4 U5.39 | length 3060.7
  TopLayer w12: U5.39@3355,2190.35 3355,2755 3600.78,3000.78 P10.C4@5749.22,3000.78
D1: P10.A4 U5.38 | length 3233.6
  TopLayer w12: U5.38@3374.8,2190.35 3374.8,2741.8 3583,2950 5900,2950 P10.A4@5950,3000
D2: P10.C5 U5.35 | length 2626.5
  TopLayer w12: U5.35@3465.35,2099.8 3515.8,2099.8 4316,2900 5725,2900 P10.C5@5750,2875
D3: P10.A5 U5.34 | length 2824.3
  TopLayer w12: U5.34@3465.35,2080.12 3526.12,2080.12 4296,2850 5900,2850 P10.A5@5950,2900
D4: P10.C6 U5.33 | length 2591
  TopLayer w12: U5.33@3465.35,2060.43 3538.43,2060.43 4278,2800 P10.C6@5750,2800
D5: P10.A6 U5.32 | length 2799
  TopLayer w12: U5.32@3465.35,2041 3552,2041 4261,2750 5900,2750 P10.A6@5950,2800
D6: P10.C7 U5.30 | length 2574.2
  TopLayer w12: U5.30@3465.35,2001 3546,2001 4245,2700 P10.C7@5750,2700
D7: P10.A7 U5.29 | length 2782.2
  TopLayer w12: U5.29@3465.35,1981.69 3560.69,1981.69 4229,2650 5900,2650 P10.A7@5950,2700
D8: P10.C8 U5.27 | length 2557.2
  TopLayer w12: U5.27@3465.35,1942 3554,1942 4212,2600 P10.C8@5750,2600
D9: P10.A8 U5.26 | length 2765.2
  TopLayer w12: U5.26@3465.35,1922.64 3567.64,1922.64 4195,2550 5900,2550 P10.A8@5950,2600
D10: P10.C9 U5.24 | length 2540.2
  TopLayer w12: U5.24@3465.35,1883 3561,1883 4178,2500 P10.C9@5750,2500
D11: P10.A9 U5.23 | length 2748.3
  TopLayer w12: U5.23@3465.35,1863.58 3575.58,1863.58 4162,2450 5900,2450 P10.A9@5950,2500
D12: P10.C10 U5.22 | length 2514.9
  TopLayer w12: U5.22@3465.35,1844 3590,1844 4146,2400 P10.C10@5750,2400
D13: P10.A10 U5.21 | length 2723.1
  TopLayer w12: U5.21@3465.35,1824.21 3603.21,1824.21 4129,2350 5900,2350 P10.A10@5950,2400
D14: P10.C11 U5.17 | length 2514.3
  TopLayer w12: U5.17@3465.35,1745.47 4055.47,1745.47 4610,2300 P10.C11@5750,2300
D15: P10.A11 U5.16 | length 2722.5
  TopLayer w12: U5.16@3465.35,1725.79 4065.79,1725.79 4590,2250 5900,2250 P10.A11@5950,2300
D_N: P7.4 U15.16 | length 656.5
  TopLayer w15: P7.4@1050,1475 1087.5,1512.5 U15.16@1690.94,1512.5
D_P: P7.3 U15.15 | length 656.5
  TopLayer w15: P7.3@1050,1575 1087.5,1537.5 U15.15@1690.94,1537.5
DACLK: U3.28 U5.2 | length 601.6
  TopLayer w12: U3.28@3450,931 3450,987 3525,1062 3525,1436 3510.8,1450.2 U5.2@3465.35,1450.2
DGND: C9.1 C10.1 C11.1 C12.1 C13.1 C24.1 C25.2 C27.1 C28.1 C29.2 C31.1 C32.1 C33.1 C34.1 C35.1 C37.1 C38.1 C39.2 C40.1 C41.1 C42.1 C43.2 C44.2 C45.2 D1.A D2.K D3.K P3.5 P4.5 P5.5 P6.1 P6.2 P7.1 P7.2 R16.1 R25.1 R33.1 R35.1 R37.1 R63.2 R68.2 R71.1 U3.15 U3.26 U4.2 U4.3 U4.4 U4.7 U5.3 U5.13 U5.25 U5.49 U5.54 U5.68 U5.77 U5.91 U5.96 U5.108 U5.113 U5.130 U5.136 U6.3 U7.3 U8.2 U15.4 U15.7 U15.19 U15.21 U15.33 U15.35 U15.48 U16.2 U16.3 U16.4 U16.7 VR1.1 VR2.1 VR3.1 | length 15167.4
  TopLayer w12: U15.48@2059.06,1687.5 2322.5,1687.5 2400.16,1765.16 U5.91@2634.65,1765.16 2690.84,1765.16 2709,1747 v1(2709,1686) 2689.73,1666.73 U5.96@2634.65,1666.73 ; U5.108@2634.65,1430.51 2769.49,1430.51 2784.25,1415.75 U5.113@2784.25,1359.65 ; U5.77@2634.65,2040.75 2771.75,2040.75 2784.25,2053.25 U5.68@2784.25,2190.35 ; U5.54@3059.84,2190.35 3059.84,2233.84 v1(3082,2256) 3136.27,2256 3158,2234.27 U5.49@3158,2190.35 ; U5.130@3118.9,1359.65 3118.9,1440.9 v1(3139,1461) ; U5.136@3237.01,1359.65 3237.01,1412.01 v1(3294.88,1469.88) ; v1@3384.95,1902.95 U5.25@3465.35,1902.95 ; U5.13@3432,1666.93 3367.93,1666.93 3294.88,1593.88 v1(3294.88,1469.88) ; U5.3@3446,1469.88 v1(3294.88,1469.88) ; U5.13@3490,1666.73 3808.27,1666.73 U4.4@3850,1625
  TopLayer w15: U15.21@1690.94,1387.5 1587.5,1387.5 v1(1575,1400) 1612.5,1437.5 U15.19@1690.94,1437.5 ; U15.7@1690.94,1737.5 1650.41,1737.5 1625,1762.91 1625,1787.09 1650.41,1812.5 U15.4@1690.94,1812.5 1761.5,1812.5 v1(1779,1795) ; U15.33@2059.06,1312.5 2125.5,1312.5 2125.5,1362.5 U15.35@2059.06,1362.5 1971.5,1362.5 1925,1409 1925,1600 2012.5,1687.5 U15.48@2059.06,1687.5 ; v1@3101,999 3117.66,982.34 U3.15@3117.66,937.8 ; v1(3375,1025) 3375,1010.01 3399.16,985.85 U3.26@3399.16,937.8 ; C39.2@4822.83,1823.42 4983.58,1823.42 5018.16,1858 5080.2,1858 5097.55,1840.65 5097.55,1764.72 5079.42,1746.58 5089.91,1746.58 5100,1736.5 5100,1595.7 5075.88,1571.58 U7.3@5057.9,1571.58 ; U6.3@5057.9,1746.58 U6.3@5074,1746.58
  TopLayer w20: v1(925,2825) R63.2@925,2910.5 ; R68.2@1025,1039.96 R68.2@1025,1025 ; P7.2@1050,1675 950,1575 950,1100 R68.2@1025,1025 ; U16.7@1350,1150 U16.2@1350,850 ; U16.4@1550,850 U16.3@1450,850 U16.2@1350,850 ; P3.5@2050,-25 2208,133 2358,133 2450,225 R35.1@2450,310.76 ; R25.1@2063,2181.54 v1(2063,2228) D1.A@2063,2271.46 ; R25.1@2063.71,2180.74 R25.1@2063.71,2181.54 ; R35.1@2450,314.96 R35.1@2450,310.76 ; R33.1@2550,310.76 R35.1@2450,310.76 ; R33.1@2550,314.96 2550,267 2624.45,192.55 D3.K@2825.75,192.55 ; D3.K@2806.72,197.28 D3.K@2825.75,197.28 D2.K@2925.75,197.28 ; v1(2970,2259) U8.2@2970,2338.26 ; C32.1@3434.96,2395 C31.1@3434.96,2490 C38.1@3434.96,2585 C27.1@3434.96,2680 v1(3435,2740) ; C42.1@3611,1495.04 C37.1@3711,1495.04 3796.2,1495.04 v1(3797.24,1494) ; C10.1@3670.04,2395 C9.1@3670.04,2490 C24.1@3670.04,2585 C41.1@3670.04,2680 v1(3670,2740) ; C40.1@3711,1274.96 C28.1@3611,1274.96 3611,935 3656.04,889.96 C33.1@3725,889.96 3725,850 3750,825 C45.2@3826.57,825 ; C11.1@3775,1910.04 C13.1@3870,1910.04 C12.1@3965,1910.04 ; U4.4@3850,1625 3879,1596 U4.2@4050,1596 ; C45.2@3863.98,834.45 VR3.1@4193.11,834.45 C44.2@4286.02,834.45 ; C13.1@3884.96,1925 C34.1@3884.96,2000 ; U4.7@4050,1325 U4.2@4050,1596 ; U4.2@4050,1625 U4.2@4050,1596 ; v1(4120,1935) C35.1@4120.04,1995 ; v1(4275,1620.06) R16.1@4275,1575 C29.2@4351.57,1575 ; v1@4280.42,1823.42 C43.2@4372.83,1823.42 4411.81,1784.44 VR2.1@4715.94,1784.44 4783.86,1784.44 C39.2@4822.83,1823.42 ; C29.2@4375,1551.57 4376.57,1550 C29.2@4379.46,1552.89 ; VR1.1@4718.11,1384.45 4786.02,1384.45 C25.2@4825,1423.43 4945.43,1423.43 5057.9,1535.9 U7.3@5057.9,1571.58 ; U6.3@5074,1746.58 U6.3@5079.42,1746.58 ; R68.2@1025,1025 1025,925 1060.04,889.96 R71.1@1125,889.96 1125,850 1175,800 1300,800 U16.2@1350,850
  TopLayer w40: P4.5@3975,3525 4235,3265 R37.1@4269.96,3265
  BottomLayer w15: P5.5@3300,3525 3350,3575 3925,3575 P4.5@3975,3525
  BottomLayer w20: v1(925,2825) 925,2700 P6.2@1050,2575 ; U16.7@1350,1150 1350,1175 v1(1575,1400) ; v1(2970,2259) v1@3079,2259 ; v1(3797.24,1494) 3850,1546.76 U4.4@3850,1600 ; U4.2@4050,1600 4050,1700 4169,1819 v1(4276,1819)
  BottomLayer w40: P7.2@1050,1675 P7.1@1050,1775 P6.1@1050,2475 P6.2@1050,2575
  other v1: 3105,991 3662,1277 2767,1430.51 3383,1901 3917.5,1910.04 2771,2040
DO0: U3.14 U5.127 | length 236.5
  TopLayer w12: U5.127@3059.84,1359.65 3059.84,1266.16 3118,1208 U3.14@3118,1147.2
DO1: U3.13 U5.131 | length 199.4
  TopLayer w12: U5.131@3138.58,1359.65 3138.58,1224 3143.25,1219.33 U3.13@3143.25,1162.2
DO2: U3.12 U5.132 | length 201.8
  TopLayer w12: U5.132@3158.27,1359.65 3158.27,1235.73 3168.84,1225.16 U3.12@3168.84,1162.2
DO3: U3.11 U5.133 | length 204.3
  TopLayer w12: U5.133@3177.95,1359.65 3177.95,1245.05 3194.43,1228.57 U3.11@3194.43,1162.2
DO4: U3.10 U5.134 | length 206.7
  TopLayer w12: U5.134@3197.64,1359.65 3197.64,1254.36 3220.02,1231.98 U3.10@3220.02,1162.2
DO5: U3.9 U5.137 | length 201.9
  TopLayer w12: U3.9@3245.61,1162.2 3245.61,1225 3256.69,1236.69 U5.137@3256.69,1359.65
DO6: U3.8 U5.138 | length 199.6
  TopLayer w12: U3.8@3271.2,1162.2 3271.2,1223.2 3276.38,1228.38 U5.138@3276.38,1359.65
DO7: U3.7 U5.139 | length 197.4
  TopLayer w12: U3.7@3296.06,1162.2 U5.139@3296.06,1359.65
DO8: U3.6 U5.140 | length 200.2
  TopLayer w12: U5.140@3315.75,1359.65 3315.75,1224.25 3322.39,1217.61 U3.6@3322.39,1162.2
DO9: U3.5 U5.141 | length 202.6
  TopLayer w12: U5.141@3335.43,1359.65 3335.43,1234.57 3347.98,1222.02 U3.5@3347.98,1162.2
DO10: U3.4 U5.142 | length 205.1
  TopLayer w12: U5.142@3355.12,1359.65 3355.12,1243.88 3373.57,1225.43 U3.4@3373.57,1162.2
DO11: U3.3 U5.143 | length 207.5
  TopLayer w12: U5.143@3374.8,1359.65 3374.8,1255.2 3399.16,1230.84 U3.3@3399.16,1162.2
DO12: U3.2 U5.144 | length 210.1
  TopLayer w12: U5.144@3395,1360 3395,1268 3424.75,1238.25 U3.2@3424.75,1162.2
DO13: U3.1 U5.1 | length 304.3
  TopLayer w12: U3.1@3450.34,1162.2 3450.34,1246.66 3421,1276 3421,1417 3434,1430 U5.1@3453,1430
DONE: D1.K R24.1 U5.71 | length 748.2
  TopLayer w12: D1.K@2136.61,2275 2136.61,2313.04 2154.57,2331 2287.57,2331 2301.61,2316.96 R24.1@2301.61,2273 2352,2273 2365,2260 2707,2260 2725.2,2241.8 U5.71@2725.2,2190.35
FD0: R52.4 U5.117 | length 641.9
  TopLayer w12: R52.4@2390.75,1106.5 2720.5,1106.5 2862.99,1248.99 U5.117@2862.99,1359.65